# Altium PCB Performance Logger.PcbDoc
Units mil, origin at the board's own origin, x right, y up, seen from the top; angles counter-clockwise.
Board outline 5680 x 4100 mil, 2 copper layers (Top, Bottom); 42 components, 74 nets, 854 pads, 10 vias.
Unrouted connection lines stored in the file: 3.
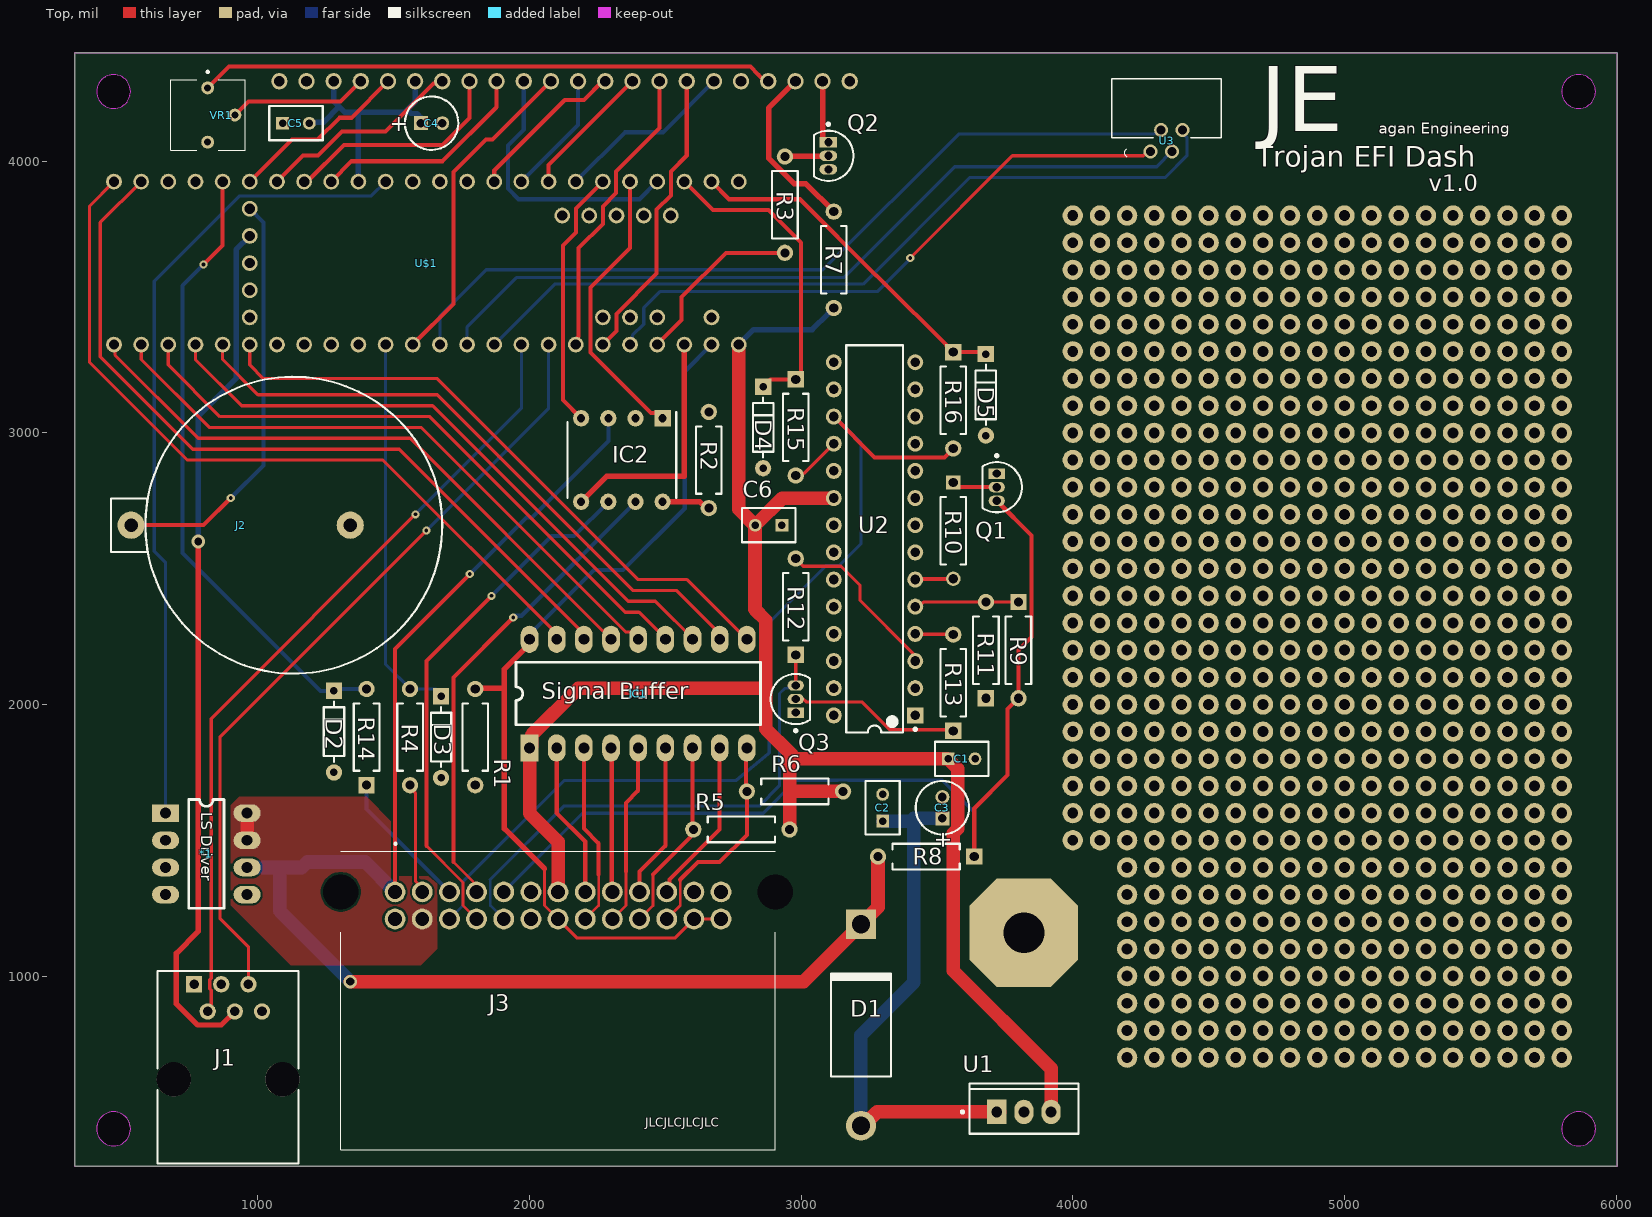
[diagram p0: Top view]
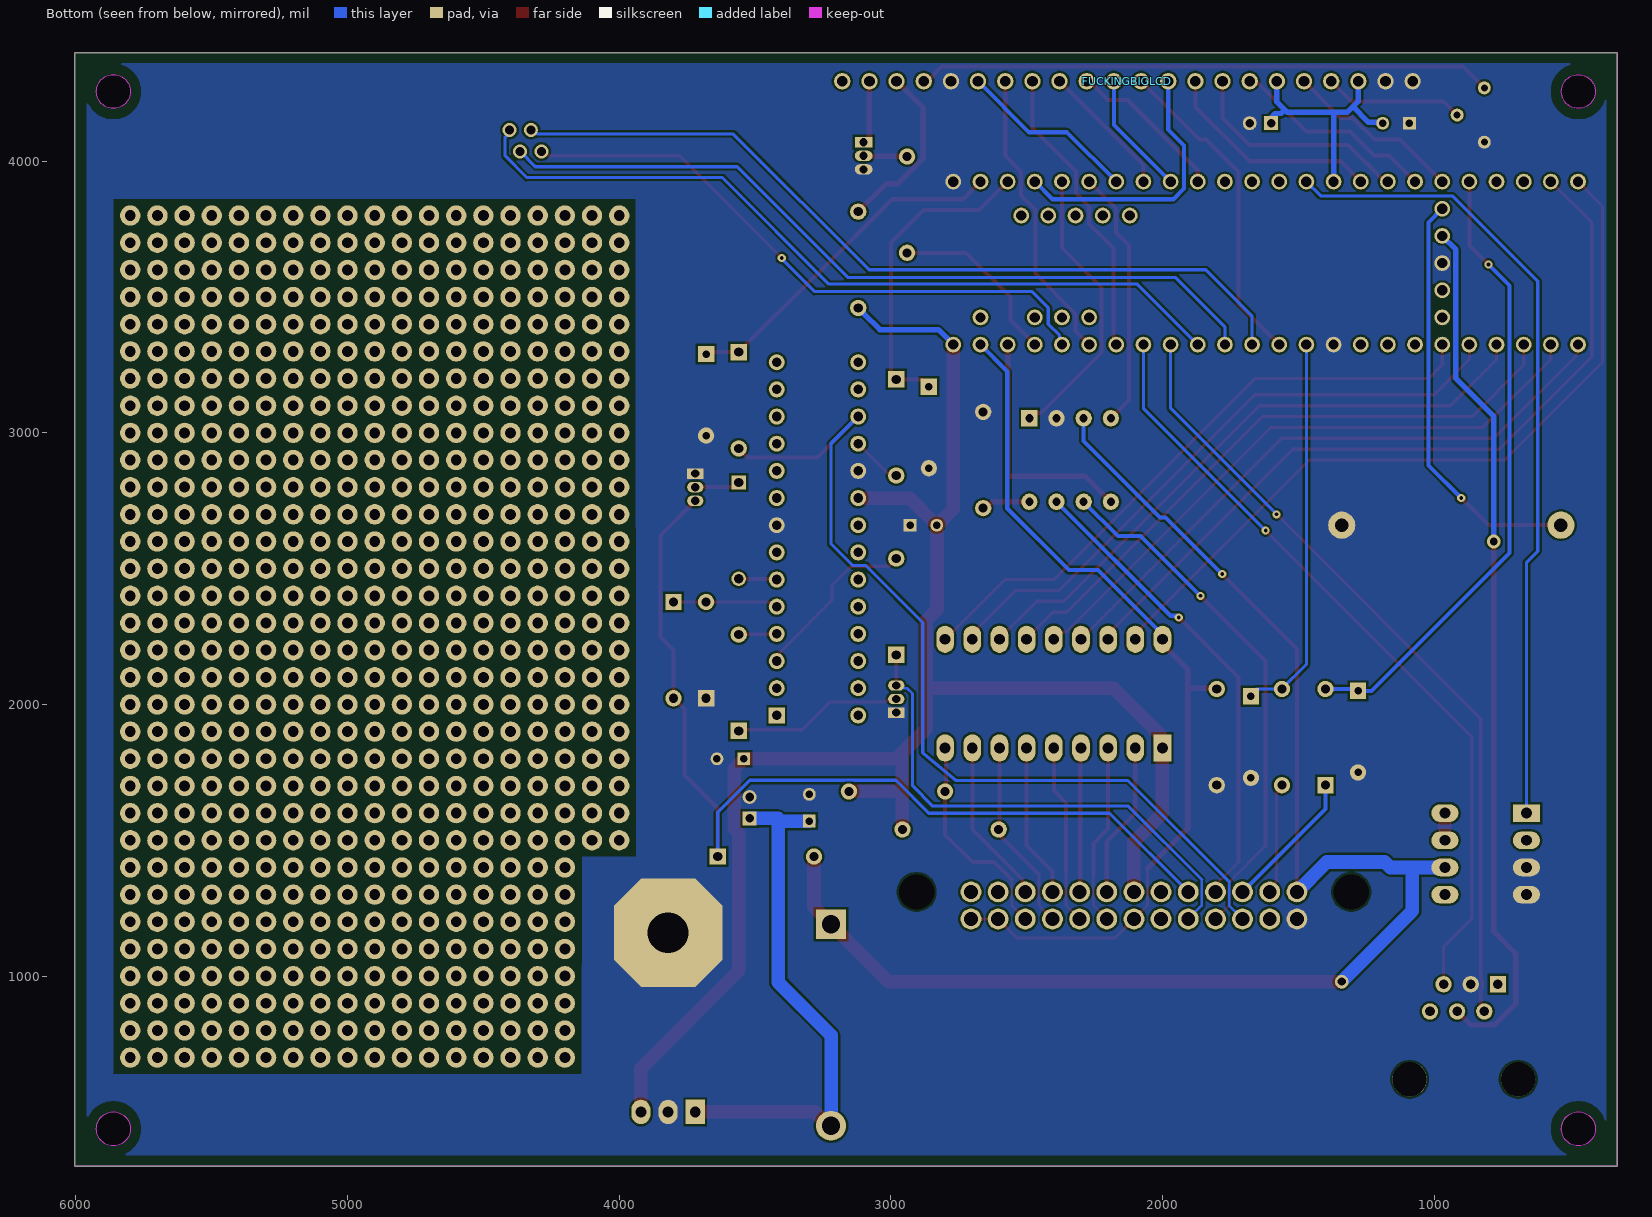
[diagram p1: Bottom view, seen from below]

## Layer stack, top to bottom
Top Solder: solder mask 0.4, Solder Resist, Dk 3.5
Top: signal copper 1.378
Dielectric 1: dielectric 12.6, FR-4, Dk 4.8
Bottom: signal copper 1.378
Bottom Solder: solder mask 0.4, Solder Resist, Dk 3.5

## Board outline
325,4400 325,300 6005,300 6005,4400
cut-out: 468.5,4194.19 ccw(c468.5,4256.69) 531,4256.69 ccw(c468.5,4256.69) 468.5,4319.19 ccw(c468.5,4256.69) 406,4256.69 ccw(c468.5,4256.69)
cut-out: 5862.2,4194.19 ccw(c5862.2,4256.69) 5924.7,4256.69 ccw(c5862.2,4256.69) 5862.2,4319.19 ccw(c5862.2,4256.69) 5799.7,4256.69 ccw(c5862.2,4256.69)
cut-out: 5862.2,375.3 ccw(c5862.2,437.8) 5924.7,437.8 ccw(c5862.2,437.8) 5862.2,500.3 ccw(c5862.2,437.8) 5799.7,437.8 ccw(c5862.2,437.8)
cut-out: 468.5,375.3 ccw(c468.5,437.8) 531,437.8 ccw(c468.5,437.8) 468.5,500.3 ccw(c468.5,437.8) 406,437.8 ccw(c468.5,437.8)

## Design rules (kind name [scope] priority, off if disabled: settings)
BoardOutlineClearance mdCopperDimension [All] p1: gap=10 ignorepadtopadclearanceinfootprint=FALSE except(0: Arc-SplitContinuation Track-SplitContinuation SMDPad-SplitContinuation THPad-SplitContinuation Via-SplitContinuation Fill-SplitContinuation Poly-SplitContinuation Region-SplitContinuation Text-SplitContinuation; 40: Poly-OutlineEdge Poly-CavityEdge Poly-CutoutEdge Poly-SplitBarrior)
Clearance [All] p1: gap=8 ignorepadtopadclearanceinfootprint=FALSE except(6: Arc-THPad Track-THPad)
HoleSize [All] p1: absolutevalues=TRUE maxlimit=100000 minlimit=13.78 maxpercent=80.000 minpercent=20.000
HoleToHoleClearance mdDrill [All] p1: gap=6 allowstackedmicrovias=TRUE
MinimumSolderMaskSliver [All] p1 off: minsoldermaskwidth=10
PasteMaskExpansion mlMinCreamFrame [All] p1: expansion=0
PolygonConnect ThermalVias [IsVia] p1: connectstyle=Direct reliefconductorwidth=10 reliefentries=4 polygonreliefangle="90 Angle" airgapwidth=10
PolygonConnect [All] p2: connectstyle=Direct reliefconductorwidth=10 reliefentries=4 polygonreliefangle="90 Angle" airgapwidth=10
RoutingVias [All] p1: holewidth=13.78 width=29.78 viastyle="Through Hole" minholewidth=13.78 minwidth=29.78 maxholewidth=100 maxwidth=100
SolderMaskExpansion mlMinStopFrame [All] p1: expansion=4 istentingtop=FALSE
Width [All] p1: maxlimit=10000 minlimit=6 preferedwidth=15 minimp=50.000000 maximp=50.000000 favimp=50.000000
26 further rules are at their usual default settings.

## Components (designator, comment, footprint, x,y, rotation, side; value= is the part's Value field where it differs from the comment)
*1 "LS_DriverV1.1" LS_DriverV1.1 660,1600 r0 top
C1 ".1u" FP-K105Z20Y5VF5TL2-MFG 3590.79,1800 r0 top value=1uF
C2 ".1u" FP-K105Z20Y5VF5TL2-MFG 3300,1620 r90 top value=1uF
C3 "10u" CAPPR55-200-1100X500X1200 3520,1620 r90 top
C4 "10u" CAPPR55-200-1100X500X1200 1639.37,4140 r0 top
C5 ".1u" FP-K105Z20Y5VF5TL2-MFG 1140,4140 r0 top value=1uF
C6 ".1u" FP-K105Z20Y5VF5TL2-MFG 2880,2660 r180 top value=1uF
D1 "SBR1045SD1-T" DO-201AD 3220,820 r90 top
D2 "1N4148TA" FP-017AG-MFG 1280,1900 r270 top value=4pF
D3 "1N4148TA" FP-017AG-MFG 1674.29,1880 r270 top value=4pF
D4 "1N4148TA" FP-017AG-MFG 2860,3020 r270 top value=4pF
D5 "1N4148TA" FP-017AG-MFG 3680,3140 r270 top value=4pF
FUCKINGBIGLCD "BIIIGGG_DEVICE" BIIIGGG_FOOTPRINT 6000,300 r180 bottom
IC1 "SignalBufferV1" DIP18 2000,1840 r90 top
IC2 "MCP2562FD-E_P" DIP781W56P254L950H533Q8N 2340,2900 r270 top
J1 "615006141121" 615006141121 889.99,664.08 r0 top
J2 "106" 106_1 459.5,2660 r180 top
J3 "185904-2" 1859042 2105,361.18 r90 top
Q1 "2N3904" ONSC-TO-92-3-29-11#1 3720,2800 r270 top
Q2 "BC337" ONSC-TO-92-3-29-11#2 3100,4020 r270 top
Q3 "2N3904" ONSC-TO-92-3-29-11#1 2980,2020 r90 top
R1 "MFR-25FBF52-1K" RESA60-630X240#1 1800,1880 r270 top value=1k
R2 "MFR-25FBF52-10K" RESA60-630X240#1 2660,2900 r270 top value=10k
R3 "1K" RESA60-630X240#1 2940,3840 r270 top
R4 "MFR-25FBF52-10K" RESA60-630X240#1 1560,1880 r90 top value=10k
R5 "MFR-25FBF52-2K21" RESA60-630X240#1 2780,1540 r0 top value=2.21k
R6 "MFR-25FBF52-2K21" RESA60-630X240#1 2977.17,1680 r0 top value=2.21k
R7 "MFR-25FBF52-221R" RESA60-630X240#1 3120,3637.17 r270 top value=221
R8 "MFR-25FBF52-475R" RESA60-630X240#2 3460,1440 r180 top value=475
R9 "MFR-25FBF52-22K1" RESA60-630X240#2 3800,2200 r270 top value=22.1k
R10 "MFR-25FBF52-2K21" RESA60-630X240#3 3560,2640 r270 top value=2.21k
R11 "MFR-25FBF52-10K" RESA60-630X240#2 3680,2200 r90 top value=10k
R12 "MFR-25FBF52-4K75" RESA60-630X240#2 2980,2360 r90 top value=4.75k
R13 "MFR-25FBF52-2K21" RESA60-630X240#2 3560,2080 r90 top value=2.21k
R14 "MFR-25FBF52-10K" RESA60-630X240#2 1400,1880 r90 top value=10k
R15 "MFR-25FBF52-1K" RESA60-630X240#2 2980,3020 r270 top value=1k
R16 "MFR-25FBF52-1K" RESA60-630X240#2 3560,3120 r270 top value=1k
U1 "LM7805CT" FAIR-TO-220-3 3820,500 r90 top
U2 "PIC18F2620-I/SP" SPDIP300-SP28 3270,2610 r180 top
U3 "SLW4R-1C7LF" FCI_SLW4R-1C7LF 4286,4036 r0 top
U$1 "TEENSY_3.5/3.6" TEENSY_3.5/3.6 1670,3625 r180 top
VR1 "T73YE103KT20" T73YE103KT20 815,4270 r90 top

## Footprints (in the part's own frame and the unit in brackets; to place one, negate y for a bottom-side part, rotate by r counter-clockwise, add the part's x,y. Pads: shape width x height; smd on the part's side, far side on the other; paste and mask are expansions set on the pad)
106_1 [mil]
  round 100 hole 50: 1(-880.5,0) 2(-73.41,0)
  silkscreen extent -1219,-546 0,546
1859042 [mm]
  round 1.95 hole 1.3: 1(24.1,15.24) 2(24.1,12.7) 3(24.1,10.16) 4(24.1,7.62) 5(24.1,5.08) 6(24.1,2.54) 7(24.1,0) 8(24.1,-2.54) 9(24.1,-5.08) 10(24.1,-7.62) 11(24.1,-10.16) 12(24.1,-12.7) 13(24.1,-15.24) 14(21.56,15.24) 15(21.56,12.7) 16(21.56,10.16) 17(21.56,7.62) 18(21.56,5.08) 19(21.56,2.54) 20(21.56,0) 21(21.56,-2.54) 22(21.56,-5.08) 23(21.56,-7.62) 24(21.56,-10.16) 25(21.56,-12.7) 26(21.56,-15.24)
  round 1.65 hole 3.3 unplated: 27(24.1,20.32) 28(24.1,-20.32)
  silkscreen extent 0,-20.32 28.7,20.32, body extent -0.06,-24.19 27.84,24.05, height 16.96
615006141121 [mil] "Modular Jack Horizontal Plastic 6P6C Tab Down"
  rect 60x60 hole 35.43: 1(-124.99,305.92)
  round 60 hole 35.43: 2(-74.99,205.92) 3(-24.99,305.92) 4(25.01,205.92) 5(75.01,305.92) 6(125.01,205.92)
  round 125.98 hole 125.98 unplated: MH1(-199.99,-44.08) MH2(200.01,-44.08)
  silkscreen extent -260,-354 260,354, body extent -260,-354 260,354, height 462
BIIIGGG_FOOTPRINT [mm] "BIIIGGG_FOOTPRINT"
  oval 1.508x1.524 hole 1: P1(125,101.46)
  round 1.524 hole 1: P2(122.46,101.46) P3(119.92,101.46) P4(117.38,101.46) P5(114.84,101.46) P6(112.3,101.46) P7(109.76,101.46) P8(107.22,101.46) P9(104.68,101.46) P10(102.14,101.46) P11(99.6,101.46) P12(97.06,101.46) P13(94.52,101.46) P14(91.98,101.46) P15(89.44,101.46) P16(86.9,101.46) P17(84.36,101.46) P18(81.82,101.46) P19(79.28,101.46) P20(76.74,101.46) P21(74.2,101.46) P22(71.66,101.46)
  body extent 70.9,100.7 125.76,103.73, height 1.27
CAPPR55-200-1100X500X1200 [mm] "THD, 2-Leads, Dia 5mm, Body Length 11mm"
  rect 1.3x1.3 hole 0.8: 1(-1,0)
  round 1.3 hole 0.8: 2(1,0)
  silkscreen extent -2.5,-2.5 2.5,2.5, body extent -2.5,-2.5 2.5,2.5, height 12
DIP18 [mil]
  rect 100x65 hole 40: 1(0,0)
  oval 100x65 hole 40: 2(0,-100) 3(0,-200) 4(0,-300) 5(0,-400) 6(0,-500) 7(0,-600) 8(0,-700) 9(0,-800) 10(400,-800) 11(400,-700) 12(400,-600) 13(400,-500) 14(400,-400) 15(400,-300) 16(400,-200) 17(400,-100) 18(400,0)
  silkscreen extent 85,-850 315,50, body extent -60,-845 460,45, height 158
DIP781W56P254L950H533Q8N [mil]
  rect 60x60 hole 29.88: 1(-153.74,150)
  round 60 hole 29.88: 2(-153.74,50) 3(-153.74,-50) 4(-153.74,-150) 5(153.74,-150) 6(153.74,-50) 7(153.74,50) 8(153.74,150)
  silkscreen extent -177,-200 140,200, body extent -159,-187 159,187, height 210
DO-201AD [mm] "Diode, Axial; Body 9.5 x 5.6 mm (LxDia. max), Lead Dia. 1.32 mm (max)"
  round 2.8 hole 1.7: 1(-9.42,0)
  rect 2.8x2.8 hole 1.7: 2(9.42,0)
  silkscreen extent -4.8,-2.8 4.9,2.8
FAIR-TO-220-3 [mil] "FM, 3-Leads, Body 10.2x4.7mm, Pitch 2.54mm"
  rect 90x70 hole 39.37: 1(0,100)
  oval 90x70 hole 39.37: 2(0,0) 3(0,-100)
  silkscreen extent -80,-201 105,231, body extent -80,-201 105,201, height 746
FCI_SLW4R-1C7LF [mil]
  round 52 hole 32: 1(0,0) 2(39,79) 3(79,0) 4(118,79)
  silkscreen extent -142,-19 260,268
FP-017AG-MFG [mil]
  rect 60x60 hole 27.56 paste-39370.1 mask+0: 1(-150.12,0)
  round 60 hole 27.56 paste-39370.1 mask+0: 2(150.12,0)
  silkscreen extent -111,-38 111,38, body extent -178,-42 178,42, height 10
FP-K105Z20Y5VF5TL2-MFG [mm]
  rect 1.2x1.2 hole 0.7 paste-1000 mask+0: 1(-1.25,0)
  round 1.2 hole 0.7 paste-1000 mask+0: 2(1.25,0)
  silkscreen extent -2.5,-1.6 2.5,1.6, body extent -2.6,-1.7 2.6,1.7, height 0.25
LS_DriverV1.1 [mil]
  rect 100x65 hole 40: 1(0,0)
  oval 100x65 hole 40: 2(0,-100) 3(0,-200) 4(0,-300) 5(300,-300) 6(300,-200) 7(300,-100) 8(300,0)
  silkscreen extent 85,-350 215,50, body extent -55,-345 355,45, height 170
ONSC-TO-92-3-29-11#1 [mil] "TO, 3-Leads, Body Dia 4.7mm, Pitch 1.27mm"
  rect 38x60 hole 30: 1(-50,0)
  oval 38x60 hole 30: 2(0,0) 3(50,0)
  silkscreen extent -121,-53 92,92, body extent -92,-53 93,93, height 310
ONSC-TO-92-3-29-11#2 [mil] "TO, 3-Leads, Body Dia 4.7mm, Pitch 1.27mm"
  rect 38x65 hole 30: 1(-50,0)
  oval 38x65 hole 30: 2(0,0) 3(50,0)
  silkscreen extent -121,-53 92,92, body extent -92,-53 93,93, height 310
RESA60-630X240#1 [mil] "Axial Resistor, 2-Leads, Dia 2.4mm, Body Length 6.3mm"
  round 60 hole 33.46: 1(-177.17,0) 2(177.17,0)
  silkscreen extent -124,-47 124,47, body extent -188,-47 188,47, height 94
RESA60-630X240#2 [mil] "Axial Resistor, 2-Leads, Dia 2.4mm, Body Length 6.3mm"
  rect 60x60 hole 33.46: 1(-177.17,0)
  round 60 hole 33.46: 2(177.17,0)
  silkscreen extent -124,-47 124,47, body extent -188,-47 188,47, height 94
RESA60-630X240#3 [mil] "Axial Resistor, 2-Leads, Dia 2.4mm, Body Length 6.3mm"
  rect 53.15x53.15 hole 33.46: 1(-177.17,0)
  round 53.15 hole 33.46: 2(177.17,0)
  silkscreen extent -124,-47 124,47, body extent -188,-47 188,47, height 94
SPDIP300-SP28 [mm] "DIP, 28-Pin, Row Spacing 7.62 mm, Pitch 2.54 mm"
  rect 1.5x1.5 hole 0.9: 1(-3.81,16.51)
  round 1.5 hole 0.9: 2(-3.81,13.97) 3(-3.81,11.43) 4(-3.81,8.89) 5(-3.81,6.35) 6(-3.81,3.81) 7(-3.81,1.27) 8(-3.81,-1.27) 9(-3.81,-3.81) 10(-3.81,-6.35) 11(-3.81,-8.89) 12(-3.81,-11.43) 13(-3.81,-13.97) 14(-3.81,-16.51) 15(3.81,-16.51) 16(3.81,-13.97) 17(3.81,-11.43) 18(3.81,-8.89) 19(3.81,-6.35) 20(3.81,-3.81) 21(3.81,-1.27) 22(3.81,1.27) 23(3.81,3.81) 24(3.81,6.35) 25(3.81,8.89) 26(3.81,11.43) 27(3.81,13.97) 28(3.81,16.51)
  silkscreen extent -3.94,-18.1 2.65,18.1, body extent -3.55,-18.1 3.55,18.1, height 5.33
T73YE103KT20 [mm]
  round 1.21 hole 0.66: 1(0,0) 2(-2.54,-2.54) 3(-5.08,0)
  silkscreen extent -5.84,-3.53 1.6,3.47, body extent -5.84,-3.53 0.76,3.47, height 4.8
TEENSY_3.5/3.6 [mil] "TEENSY_3.5/3.6"
  round 58 hole 38: 0/RX(-1000,-300) 1/TX(-900,-300) 2(-800,-300) 3/CANTX(-700,-300) 3V3(300,-300) 3V3_2(700,-100) 3V3_LO(-900,300) 4/CANRX(-600,-300) 5(-500,-300) 6(-400,-300) 7(-300,-300) 8(-200,-300) 9/CS(-100,-300) 10/CS(0,-300) 11/MOSI(100,-300) 12/MISO(200,-300) 13/SCK(200,300) 14/A0(100,300) 15/A1(0,300) 16/A2(-100,300) 17/A3(-200,300) 18/A4/SDA(-300,300) 19/A5/SCL(-400,300) 20/A6(-500,300) 21/A7(-600,300) 21/DAC0(500,300) 22/A8(-700,300) 23/A9(-800,300) 24(400,-300) 25(500,-300) 26(600,-300) 27(700,-300) 28(800,-300) 29(900,-300) 30(1000,-300) 31/A12(1100,-300) 32/A13(1200,-300) 33/A14(1200,300) 34/A15(1100,300) 35/A16(1000,300) 36/A17(900,300) 37/A18(800,300) 38/A19(700,300) 39/A20(600,300) A10(-700,200) A11(-600,200) A22/DAC1(400,300) AGND(-1000,300) AREF(-800,200) GND(-1100,-300) GND2(300,300) GND3(700,0) PROG(700,100) RESET(700,200) U5V(-850,-175) UD+(-650,-175) UD-(-750,-175) UGND1(-550,-175) UGND2(-450,-175) VBAT(700,-200) VIN(-1100,300) VUSB(-1000,200)
  body extent -1129,-329 1229,329, height 50

## Part data
*1: library part CMP-001-0000-1, "10A capable Low side Switch in an 8dip"
C1 C2 C5 C6: library part CMP-02417-000003-1, "CAP CER 1UF 50V Y5V RADIAL", Capacitance=1uF, Manufacturer="Vishay BC Components", Manufacturer Part Number=K105Z20Y5VF5TL2, Temperature="-30°C to +85°C", Temperature Characteristic=Y5V, Temperature Range High=+85°C, Temperature Range Low=-30°C, Tolerance=-20+80%, Voltage Rating=50V, Automotive=No, Category=Cap, ComponentLink2Description=Datasheet, ComponentLink2URL=https://www.vishay.com/docs/45171/kseries.pdf, Device Class L1="Passive Components", Device Class L2=Capacitors, Device Class L3="Ceramic Capacitors", Digikey Description="CAP CER 1UF 50V Y5V RADIAL", Height=6.6mm, Lead Free=Yes, Material=Ceramic, Mouser Description="Multilayer Ceramic Capacitors MLCC - Leaded 1uF 50volts +80/-20% Y5V 2.5mm LS", Octopart=https://octopart.com/k105z20y5vf5tl2-vishay-39475252, Package=K105Z20Y5VF5TL2, RoHS=TRUE
C3 C4: library part CMP-1665-00038-2, "Aluminum Electrolytic Capacitor, 10 uF, +/- 20%, 50 V, -40 to 85 degC, 2-Pin THD, RoHS, Bulk", Capacitance=10uF, Case/Package=Radial, Dielectric Material=Aluminium, Leakage Current=3uA, Manufacturer=Panasonic, Max Operating Temperature=85degC, Min Operating Temperature=-40degC, Package Description="2-Pin Radial Lead, Dia 5 mm, Height 12 mm", Package Quantity=200, Package Reference=CAPPR55-200-1100X500X1200, Ripple Current=65mA, Tolerance=20%, Voltage=50V, Datasheet URL=https://industrial.panasonic.com/cdbs/www-data/pdf/RDF0000/ABA0000C1218.pdf, Datasheet Version="Rev. 05, 10/2016", Diameter=5mm, Dissipation Factor=0.12%, Height=11mm, Height - Seated (Max)=0.472inch, Lead Diameter=0.5mm, Lead Free=LeadFree, Lead Pitch=2mm, Lead/Base Style=Straight, Length=11mm, Life (Hours)=2000Hour, Manufacturer URL=http://www.panasonic.com/, Mount=ThroughHole, Number of Pins=2, Packaging=Bulk, Radiation Hardening=No, REACH SVHC=NoSVHC, Ripple Current (AC)=65mA, RoHSCompliant=true, Termination=Radial, Voltage Rating=50V, Voltage Rating (DC)=50V
D1: "Diode", Manufacturer_Name="Diodes Inc.", Mouser Part Number=621-SBR1045SD1-T, Arrow Part Number=SBR1045SD1-T, Arrow Price/Stock=https://www.arrow.com/en/products/sbr1045sd1-t/diodes-incorporated, Datasheet Link=https://static6.arrow.com/aropdfconversion/e9ac78d29ec4e1440bcb8a4d828fb4ad9c4e4821/sbr1045sd1.pdf, Manufacturer_Part_Number=SBR1045SD1-T, Mouser Price/Stock=https://www.mouser.co.uk/ProductDetail/Diodes-Incorporated/SBR1045SD1-T?qs=aXnpsjvrXd14ZHU8QjK7zA%3D%3D
D2 D3 D4 D5: library part CMP-07163-000009-1, "DIODE GEN PURP 100V 200MA DO35", Capacitance=4pF, Forward Current=200mA, Manufacturer="ON Semiconductor", Max Junction Temp=+175°C, Max Repetitive Reverse Voltage=100V, Max Surge Forward Current=1A, Package=017AG, Peak Reverse Current=5uA, Temperature="-55°C to +175°C", Temperature Range Low=-55°C, Automotive=No, Category=Diode, ComponentLink2Description=Datasheet, ComponentLink2URL=https://www.onsemi.com/pub/Collateral/1N914A-D.pdf, Device Class L1="Discrete Semiconductors", Device Class L2=Diodes, Device Class L3="Rectifier Diodes", Digikey Description="DIODE GEN PURP 100V 200MA DO35", Footprint Url=https://www.onsemi.com/pub/Collateral/017AG.PDF, Height=1.91mm, Lead Free=Yes, Manufacturer Part Number=1N4148TA, Octopart=https://octopart.com/1n4148ta-on+semiconductor-84323124, Reverse Voltage=100V, RoHS=TRUE, Temperature Range High=+175°C
IC1: library part SignalBufferV1-7, "Signal Buffer Board"
IC2: "Integrated Circuit", Arrow Part Number=MCP2562FD-E/P, Manufacturer_Name=Microchip, Mouser Part Number=579-MCP2562FD-E/P, Arrow Price/Stock=https://www.arrow.com/en/products/mcp2562fd-ep/microchip-technology, Datasheet Link=https://componentsearchengine.com/Datasheets/2/MCP2562FD-E_P.pdf, Height=5.334mm, Manufacturer_Part_Number=MCP2562FD-E/P, Mouser Price/Stock=https://www.mouser.co.uk/ProductDetail/Microchip-Technology/MCP2562FD-E-P?qs=YlpJWyuQ3PMgzspdOlrnPg%3D%3D
J1: library part CMP-1502-01674-1, "Modular Jack WR-MJ, Tab Down, Plastic, Horizontal Entry, THT, 6P6C", Contact Resistance=20mOhm, Manufacturer="Wurth Elektronik", Operating Temperature=-40to85degC, Rated Current=1.5A, Withstanding Voltage=1000VAC, Working Voltage=120VAC, Compliance=Leadfree/RoHS, Datasheet URL=https://katalog.we-online.com/em/datasheet/615006141121.pdf, Entrance=Horizontal, Manufacturer URL=http://www.we-online.de, Mounting Technology=THT, Package Reference=615006141121, Packaging=Tray, Part Number=615006141121, Pin Number=6P6C, Port=1x1, Publisher=WurthElektronik
J2: "Connector", Manufacturer_Name="Keystone Electronics", Mouser Part Number=534-106, Arrow Part Number=106, Arrow Price/Stock=https://www.arrow.com/en/products/106/keystone-electronics, Datasheet Link=http://docs-emea.rs-online.com/webdocs/002b/0900766b8002b5fd.pdf, Manufacturer_Part_Number=106, Mouser Price/Stock=https://www.mouser.co.uk/ProductDetail/Keystone-Electronics/106?qs=Q3RoVmURDolnMuconA2vXg%3D%3D
J3: "Connector", Manufacturer_Name="TE Connectivity", Mouser Part Number=571-185904-2, Arrow Part Number=185904-2, Arrow Price/Stock=https://www.arrow.com/en/products/185904-2/te-connectivity, Datasheet Link=http://www.te.com/commerce/DocumentDelivery/DDEController?Action=srchrtrv&DocNm=185904&DocType=Customer+Drawing&DocLang=English&DocFormat=pdf&PartCntxt=1-185904-2, Height=17mm, Manufacturer_Part_Number=185904-2, Mouser Price/Stock=https://www.mouser.co.uk/ProductDetail/TE-Connectivity-AMP/185904-2?qs=UMrTGIqlm7mWBHkoAKrGLw%3D%3D
Q1 Q3: library part CMP-2000-05562-1, "General Purpose Transistor, NPN Silicon, 200 mA, 60 V, -55 to 150 degC, 3-Pin TO-92, RoHS, Bulk", Collector- Base Voltage VCBO=60V, Collector- Emitter Voltage VCEO Max=40V, Collector-Emitter Saturation Voltage=0.3V, Emitter- Base Voltage VEBO=6V, Manufacturer=ONSemiconductor, Maximum DC Collector Current=0.2A, Maximum Operating Temperature=+150C, Maximum Power Dissipation=625mW, Minimum Operating Temperature=-65C, Package / Case=TO-92-3(TO-226), Package Description="3-Pin Transistor Outline, Body 4.825 x 3.685 mm, Pitch 1.27 mm", Package Reference=TO-92-3-29-11, Brand=ONSemiconductor, Configuration=Single, Datasheet URL=https://datasheet.ciiva.com/4725/2n3903-d-285841-4725808.pdf, Datasheet Version="Rev. 8, 08/2012", DC Collector/Base Gain hfe Min=60, Factory Pack Quantity=5000, Gain Bandwidth Product fT=270MHz, Manufacturer URL=http://www.onsemi.com/, Mounting Style=ThroughHole, Mounting Technology=ThroughHole, Packaging=Bulk, Product Category=BipolarTransistors-BJT, RoHS=Details, Transistor Polarity=NPN
Q2: library part CMP-1048-01458-1, "Amplifier Transistor, NPN Silicon, 3-Pin TO-92, Bulk Box", Manufacturer="On Semiconductor", ComponentLink1Description="Manufacturer URL", ComponentLink1URL=http://www.onsemi.com/, ComponentLink2Description=Datasheet, ComponentLink2URL=http://www.onsemi.com/pub_link/Collateral/BC337-D.PDF, ComponentLink3Description="Package Specification", ComponentLink3URL=http://www.onsemi.cn/pub_link/Collateral/2N6426-D.PDF, DatasheetVersion="Rev. 8", IC Continuous (A)=0.8, Mounting Technology="Through Hole", Note1=0, PackageDescription="3-Pin Transistor Outline, Body 4.825 x 3.685 mm, Pitch 1.27 mm", PackageReference=TO-92-3-29-11_AM_SL, PackageVersion="Rev. AM", Packing="Bulk Box", PartNumber=BC337, Polarity=NPN, RoHS=FALSE
R1 R15 R16: library part CMP-009-00048-4, "Axial Resistor, 1 KOhm, +/- 1%, 250 mW, -55 to 155 degC, 2-Pin THD, RoHS, Bulk", Case/Package=Axial, Manufacturer=Yageo, Max Operating Temperature=155°C, Min Operating Temperature=-55°C, Package Description="2-Pin Axial Lead, Dia 2.4 mm, Body Length 6.3 mm", Package Quantity=200, Package Reference=MFR-25, Power=250mW, Tolerance=1%, Voltage Rating=250V, Composition=CarbonFilm, Datasheet URL=http://www.yageo.com/documents/recent/Yageo%20LR_MFR_2013.pdf, Datasheet Version=Apr-13, Manufacturer URL=http://www.yageo.com/, Mounting Technology=TH, Packaging=Bulk, RoHS Compliant=True
R2 R4 R11 R14: library part CMP-009-00047-4, "Axial Resistor, 10 KOhm, +/- 1%, 0.25 W, -55 to 155 degC, 2-Pin THD, RoHS, Bulk", Case/Package=Axial, Manufacturer=Yageo, Max Operating Temperature=155°C, Min Operating Temperature=-55°C, Package Description="2-Pin Axial Lead, Dia 2.4 mm, Body Length 6.3 mm", Package Quantity=200, Package Reference=MFR-25, Power=250mW, Tolerance=1%, Voltage Rating=250V, Datasheet URL=http://www.yageo.com/documents/recent/Yageo%20LR_MFR_2013.pdf, Datasheet Version=Apr-13, Manufacturer URL=http://www.yageo.com/, Mounting Technology=TH, Packaging=Bulk, RoHS Compliant=True
R3: library part CMP-1659-00075-1, "Axial Resistor, 1 KOhm, +/- 1%, 250 mW, -55 to 155 degC, 2-Pin THD, RoHS, Bulk", Case\Package=Axial, Max Operating Temperature="155 degC", Min Operating Temperature="-55 degC", Package Quantity=200, Power Rating="250 mW", Resistance="10 kohm", Tolerance=1%, Voltage Rating="250 V", ComponentLink1Description="Manufacturer URL", ComponentLink1URL=http://www.yageo.com/, ComponentLink2Description=Datasheet, ComponentLink2URL=http://www.yageo.com/documents/recent/Yageo%20LR_MFR_2013.pdf, DatasheetVersion=Apr-13, Length="0.248 inch", PackageDescription="2-Pin Axial Lead, Dia 2.4 mm, Body Length 6.3 mm", PackageReference=MFR-25, Packaging=Bulk, RoHSCompliant=true
R5 R6 R10 R13: library part CMP-009-00054-4, "Axial Resistor, 2.21 KOhm, +/- 1%, 0.25 W, -55 to 155 degC, 2-Pin THD, RoHS, Bulk", Case/Package=Axial, Manufacturer=Yageo, Max Operating Temperature=155°C, Min Operating Temperature=-55°C, Package Description="2-Pin Axial Lead, Dia 2.4 mm, Body Length 6.3 mm", Package Quantity=200, Package Reference=MFR-25, Power=250mW, Tolerance=1%, Voltage Rating=250V, Datasheet URL=http://www.yageo.com/documents/recent/Yageo%20LR_MFR_2013.pdf, Datasheet Version=Apr-13, Manufacturer URL=http://www.yageo.com/, Mounting Technology=TH, Packaging=Bulk, RoHS Compliant=True
R7: library part CMP-009-00051-4, "Axial Resistor, 221 Ohm, +/- 1%, 250 mW, -55 to 155 degC, 2-Pin THD, RoHS, Bulk", Case/Package=Axial, Manufacturer=Yageo, Max Operating Temperature=155°C, Min Operating Temperature=-55°C, Package Description="2-Pin Axial Lead, Dia 2.4 mm, Body Length 6.3 mm", Package Quantity=200, Package Reference=MFR-25, Power=250mW, Tolerance=1%, Voltage Rating=250V, Datasheet URL=http://www.yageo.com/documents/recent/Yageo%20LR_MFR_2013.pdf, Datasheet Version=Apr-13, Manufacturer URL=http://www.yageo.com/, Mounting Technology=TH, Packaging=Bulk, RoHS Compliant=True
R8: library part CMP-009-00056-4, "Axial Resistor, 475 Ohm, +/- 1%, 0.25 W, -55 to 155 degC, 2-Pin THD, RoHS, Bulk", Case/Package=Axial, Manufacturer=Yageo, Max Operating Temperature=155°C, Min Operating Temperature=-55°C, Package Description="2-Pin Axial Lead, Dia 2.4 mm, Body Length 6.3 mm", Package Quantity=200, Package Reference=MFR-25, Power=250mW, Tolerance=1%, Voltage Rating=250V, Datasheet URL=http://www.yageo.com/documents/recent/Yageo%20LR_MFR_2013.pdf, Datasheet Version=Apr-13, Manufacturer URL=http://www.yageo.com/, Mounting Technology=TH, Packaging=Bulk, RoHS Compliant=True
R9: library part CMP-009-00052-4, "Axial Resistor, 22.1 KOhm, +/- 1%, 0.25 W, -55 to 155 degC, 2-Pin THD, RoHS, Bulk", Case/Package=Axial, Manufacturer=Yageo, Max Operating Temperature=155°C, Min Operating Temperature=-55°C, Package Description="2-Pin Axial Lead, Dia 2.4 mm, Body Length 6.3 mm", Package Quantity=200, Package Reference=MFR-25, Power=250mW, Tolerance=1%, Voltage Rating=250V, Datasheet URL=http://www.yageo.com/documents/recent/Yageo%20LR_MFR_2013.pdf, Datasheet Version=Apr-13, Manufacturer URL=http://www.yageo.com/, Mounting Technology=TH, Packaging=Bulk, RoHS Compliant=True
R12: library part CMP-009-00059-4, "Axial Resistor, 4.75 KOhm, +/- 1%, 0.25 W, -55 to 155 degC, 2-Pin THD, RoHS, Bulk", Case/Package=Axial, Manufacturer=Yageo, Max Operating Temperature=155°C, Min Operating Temperature=-55°C, Package Description="2-Pin Axial Lead, Dia 2.4 mm, Body Length 6.3 mm", Package Quantity=200, Package Reference=MFR-25, Power=250mW, Tolerance=1%, Voltage Rating=250V, Composition=MetalFilm, Datasheet URL=http://www.yageo.com/documents/recent/Yageo%20LR_MFR_2013.pdf, Datasheet Version=Apr-13, Manufacturer URL=http://www.yageo.com/, Mounting Technology=TH, Packaging=Bulk, RoHS Compliant=True
U1: library part CMP-2000-04938-1, "Positive Voltage Regulator, 5 V, 1 A, -40 to 125 degC, 3-Pin TO-220, RoHS, Tube", Manufacturer=FairchildSemiconductor, Maximum Input Voltage=35V, Maximum Output Current=2.2(Typ)A, Maximum Quiescent Current=8mA, Operating Temperature=-40to125degC, Output Voltage=5V, Package=3TO-220AB, Package Description="3-Pin Through Hole Device, Body 10 x 4.5 mm, Pitch 2.54 mm", Package Reference=TO-220, Typical Dropout Voltage @ Current=2@1AV, Accuracy=±4%, Category=LinearRegulator, Datasheet URL=https://datasheet.ciiva.com/26904/lm7805ct-26904988.pdf, Datasheet Version=Aug-12, Line Regulation=100mV, Load Regulation=100mV, Manufacturer URL=https://www.fairchildsemi.com/, Mounting=ThroughHole, Number of Outputs=1, Output Type=Fixed, Package URL=https://www.fairchildsemi.com/package-drawings/TO/TO220B03.pdf, Packaging=Rail/Tube, Polarity=Positive, Rad Hard=No, Type=Linear
U2: library part CMP-0116-00068-1, "Enhanced Flash Microcontroller with 10-Bit A/D and nanoWatt Technology, 64K Flash, 28-Pin PDIP, Industrial Temperature Range", DatasheetVersion="revE, May-2008", PackageDescription="28-Lead Skinny Plastic Dual In-Line (SP) - 300 mil Body [SPDIP]", PackageReference=SPDIP300-SP28, PackageVersion="revBB, Aug-2009"
U3: "4 Position FFC, FPC Connector Contacts, Bottom 0.039 (1.00mm) Through Hole, Right Angle", Package=None, Digi-Key_Part_Number=609-1928-ND, DigiKey-Purchase-URL=https://snapeda.com/shop?store=DigiKey&id=31876, MF="Amphenol ICC", MP=SLW4R-1C7LF, SnapEDA_Link=https://www.snapeda.com/parts/SLW4R-1C7LF/Amphenol%20FCI/view-part/31876/?ref=snap
VR1: "Variable Resistor", Manufacturer_Name=Vishay, Mouser Part Number=72-T70YE-10K, Arrow Part Number=T73YE103KT20, Arrow Price/Stock=https://www.arrow.com/en/products/t73ye103kt20/vishay, Datasheet Link=https://www.mouser.com/datasheet/2/427/t73-239983.pdf, Height=4.7mm, Manufacturer_Part_Number=T73YE103KT20, Mouser Price/Stock=https://www.mouser.co.uk/ProductDetail/Vishay-Sfernice/T73YE103KT20?qs=LCMWAU1DZczcFWP7UOhLsQ%3D%3D
FUCKINGBIGLCD: DeviceSetName=BIIIGGG_DEVICE, GateName_1=G$1, LibraryName="Biiiggg LCD", SymbolName_1=BIIIGGG_SYMBOL
U$1: DeviceSetName=TEENSY_3.5/3.6, GateName_1=G$1, LibraryName=Teensy356, SymbolName_1=TEENSY_3.5/3.6

## Free pads (board coordinates)
  round 75 hole 40: 0(4000,1500) 0(4000,1600) 0(4000,1700) 0(4000,1800) 0(4000,1900) 0(4000,2000) 0(4000,2100) 0(4000,2200) 0(4000,2300) 0(4000,2400) 0(4000,2500) 0(4000,2600) 0(4000,2700) 0(4000,2800) 0(4000,2900) 0(4000,3000) 0(4000,3100) 0(4000,3200) 0(4000,3300) 0(4000,3400) 0(4000,3500) 0(4000,3600) 0(4000,3700) 0(4000,3800) 0(4100,1500) 0(4100,1600) 0(4100,1700) 0(4100,1800) 0(4100,1900) 0(4100,2000) 0(4100,2100) 0(4100,2200) 0(4100,2300) 0(4100,2400) 0(4100,2500) 0(4100,2600) 0(4100,2700) 0(4100,2800) 0(4100,2900) 0(4100,3000) 0(4100,3100) 0(4100,3200) 0(4100,3300) 0(4100,3400) 0(4100,3500) 0(4100,3600) 0(4100,3700) 0(4100,3800) 0(4200,700) 0(4200,800) 0(4200,900) 0(4200,1000) 0(4200,1100) 0(4200,1200) 0(4200,1300) 0(4200,1400) 0(4200,1500) 0(4200,1600) 0(4200,1700) 0(4200,1800) 0(4200,1900) 0(4200,2000) 0(4200,2100) 0(4200,2200) 0(4200,2300) 0(4200,2400) 0(4200,2500) 0(4200,2600) 0(4200,2700) 0(4200,2800) 0(4200,2900) 0(4200,3000) 0(4200,3100) 0(4200,3200) 0(4200,3300) 0(4200,3400) 0(4200,3500) 0(4200,3600) 0(4200,3700) 0(4200,3800) 0(4300,700) 0(4300,800) 0(4300,900) 0(4300,1000) 0(4300,1100) 0(4300,1200) 0(4300,1300) 0(4300,1400) 0(4300,1500) 0(4300,1600) 0(4300,1700) 0(4300,1800) 0(4300,1900) 0(4300,2000) 0(4300,2100) 0(4300,2200) 0(4300,2300) 0(4300,2400) 0(4300,2500) 0(4300,2600) 0(4300,2700) 0(4300,2800) 0(4300,2900) 0(4300,3000) 0(4300,3100) 0(4300,3200) 0(4300,3300) 0(4300,3400) 0(4300,3500) 0(4300,3600) 0(4300,3700) 0(4300,3800) 0(4400,700) 0(4400,800) 0(4400,900) 0(4400,1000) 0(4400,1100) 0(4400,1200) 0(4400,1300) 0(4400,1400) 0(4400,1500) 0(4400,1600) 0(4400,1700) 0(4400,1800) 0(4400,1900) 0(4400,2000) 0(4400,2100) 0(4400,2200) 0(4400,2300) 0(4400,2400) 0(4400,2500) 0(4400,2600) 0(4400,2700) 0(4400,2800) 0(4400,2900) 0(4400,3000) 0(4400,3100) 0(4400,3200) 0(4400,3300) 0(4400,3400) 0(4400,3500) 0(4400,3600) 0(4400,3700) 0(4400,3800) 0(4500,700) 0(4500,800) 0(4500,900) 0(4500,1000) 0(4500,1100) 0(4500,1200) 0(4500,1300) 0(4500,1400) 0(4500,1500) 0(4500,1600) 0(4500,1700) 0(4500,1800) 0(4500,1900) 0(4500,2000) 0(4500,2100) 0(4500,2200) 0(4500,2300) 0(4500,2400) 0(4500,2500) 0(4500,2600) 0(4500,2700) 0(4500,2800) 0(4500,2900) 0(4500,3000) 0(4500,3100) 0(4500,3200) 0(4500,3300) 0(4500,3400) 0(4500,3500) 0(4500,3600) 0(4500,3700) 0(4500,3800) 0(4600,700) 0(4600,800) 0(4600,900) 0(4600,1000) 0(4600,1100) 0(4600,1200) 0(4600,1300) 0(4600,1400) 0(4600,1500) 0(4600,1600) 0(4600,1700) 0(4600,1800) 0(4600,1900) 0(4600,2000) 0(4600,2100) 0(4600,2200) 0(4600,2300) 0(4600,2400) 0(4600,2500) 0(4600,2600) 0(4600,2700) 0(4600,2800) 0(4600,2900) 0(4600,3000) 0(4600,3100) 0(4600,3200) 0(4600,3300) 0(4600,3400) 0(4600,3500) 0(4600,3600) 0(4600,3700) 0(4600,3800) 0(4700,700) 0(4700,800) 0(4700,900) 0(4700,1000) 0(4700,1100) 0(4700,1200) 0(4700,1300) 0(4700,1400) 0(4700,1500) 0(4700,1600) 0(4700,1700) 0(4700,1800) 0(4700,1900) 0(4700,2000) 0(4700,2100) 0(4700,2200) 0(4700,2300) 0(4700,2400) 0(4700,2500) 0(4700,2600) 0(4700,2700) 0(4700,2800) 0(4700,2900) 0(4700,3000) 0(4700,3100) 0(4700,3200) 0(4700,3300) 0(4700,3400) 0(4700,3500) 0(4700,3600) 0(4700,3700) 0(4700,3800) 0(4800,700) 0(4800,800) 0(4800,900) 0(4800,1000) 0(4800,1100) 0(4800,1200) 0(4800,1300) 0(4800,1400) 0(4800,1500) 0(4800,1600) 0(4800,1700) 0(4800,1800) 0(4800,1900) 0(4800,2000) 0(4800,2100) 0(4800,2200) 0(4800,2300) 0(4800,2400) 0(4800,2500) 0(4800,2600) 0(4800,2700) 0(4800,2800) 0(4800,2900) 0(4800,3000) 0(4800,3100) 0(4800,3200) 0(4800,3300) 0(4800,3400) 0(4800,3500) 0(4800,3600) 0(4800,3700) 0(4800,3800) 0(4900,700) 0(4900,800) 0(4900,900) 0(4900,1000) 0(4900,1100) 0(4900,1200) 0(4900,1300) 0(4900,1400) 0(4900,1500) 0(4900,1600) 0(4900,1700) 0(4900,1800) 0(4900,1900) 0(4900,2000) 0(4900,2100) 0(4900,2200) 0(4900,2300) 0(4900,2400) 0(4900,2500) 0(4900,2600) 0(4900,2700) 0(4900,2800) 0(4900,2900) 0(4900,3000) 0(4900,3100) 0(4900,3200) 0(4900,3300) 0(4900,3400) 0(4900,3500) 0(4900,3600) 0(4900,3700) 0(4900,3800) 0(5000,700) 0(5000,800) 0(5000,900) 0(5000,1000) 0(5000,1100) 0(5000,1200) 0(5000,1300) 0(5000,1400) 0(5000,1500) 0(5000,1600) 0(5000,1700) 0(5000,1800) 0(5000,1900) 0(5000,2000) 0(5000,2100) 0(5000,2200) 0(5000,2300) 0(5000,2400) 0(5000,2500) 0(5000,2600) 0(5000,2700) 0(5000,2800) 0(5000,2900) 0(5000,3000) 0(5000,3100) 0(5000,3200) 0(5000,3300) 0(5000,3400) 0(5000,3500) 0(5000,3600) 0(5000,3700) 0(5000,3800) 0(5100,700) 0(5100,800) 0(5100,900) 0(5100,1000) 0(5100,1100) 0(5100,1200) 0(5100,1300) 0(5100,1400) 0(5100,1500) 0(5100,1600) 0(5100,1700) 0(5100,1800) 0(5100,1900) 0(5100,2000) 0(5100,2100) 0(5100,2200) 0(5100,2300) 0(5100,2400) 0(5100,2500) 0(5100,2600) 0(5100,2700) 0(5100,2800) 0(5100,2900) 0(5100,3000) 0(5100,3100) 0(5100,3200) 0(5100,3300) 0(5100,3400) 0(5100,3500) 0(5100,3600) 0(5100,3700) 0(5100,3800) 0(5200,700) 0(5200,800) 0(5200,900) 0(5200,1000) 0(5200,1100) 0(5200,1200) 0(5200,1300) 0(5200,1400) 0(5200,1500) 0(5200,1600) 0(5200,1700) 0(5200,1800) 0(5200,1900) 0(5200,2000) 0(5200,2100) 0(5200,2200) 0(5200,2300) 0(5200,2400) 0(5200,2500) 0(5200,2600) 0(5200,2700) 0(5200,2800) 0(5200,2900) 0(5200,3000) 0(5200,3100) 0(5200,3200) 0(5200,3300) 0(5200,3400) 0(5200,3500) 0(5200,3600) 0(5200,3700) 0(5200,3800) 0(5300,700) 0(5300,800) 0(5300,900) 0(5300,1000) 0(5300,1100) 0(5300,1200) 0(5300,1300) 0(5300,1400) 0(5300,1500) 0(5300,1600) 0(5300,1700) 0(5300,1800) 0(5300,1900) 0(5300,2000) 0(5300,2100) 0(5300,2200) 0(5300,2300) 0(5300,2400) 0(5300,2500) 0(5300,2600) 0(5300,2700) 0(5300,2800) 0(5300,2900) 0(5300,3000) 0(5300,3100) 0(5300,3200) 0(5300,3300) 0(5300,3400) 0(5300,3500) 0(5300,3600) 0(5300,3700) 0(5300,3800) 0(5400,700) 0(5400,800) 0(5400,900) 0(5400,1000) 0(5400,1100) 0(5400,1200) 0(5400,1300) 0(5400,1400) 0(5400,1500) 0(5400,1600) 0(5400,1700) 0(5400,1800) 0(5400,1900) 0(5400,2000) 0(5400,2100) 0(5400,2200) 0(5400,2300) 0(5400,2400) 0(5400,2500) 0(5400,2600) 0(5400,2700) 0(5400,2800) 0(5400,2900) 0(5400,3000) 0(5400,3100) 0(5400,3200) 0(5400,3300) 0(5400,3400) 0(5400,3500) 0(5400,3600) 0(5400,3700) 0(5400,3800) 0(5500,700) 0(5500,800) 0(5500,900) 0(5500,1000) 0(5500,1100) 0(5500,1200) 0(5500,1300) 0(5500,1400) 0(5500,1500) 0(5500,1600) 0(5500,1700) 0(5500,1800) 0(5500,1900) 0(5500,2000) 0(5500,2100) 0(5500,2200) 0(5500,2300) 0(5500,2400) 0(5500,2500) 0(5500,2600) 0(5500,2700) 0(5500,2800) 0(5500,2900) 0(5500,3000) 0(5500,3100) 0(5500,3200) 0(5500,3300) 0(5500,3400) 0(5500,3500) 0(5500,3600) 0(5500,3700) 0(5500,3800) 0(5600,700) 0(5600,800) 0(5600,900) 0(5600,1000) 0(5600,1100) 0(5600,1200) 0(5600,1300) 0(5600,1400) 0(5600,1500) 0(5600,1600) 0(5600,1700) 0(5600,1800) 0(5600,1900) 0(5600,2000) 0(5600,2100) 0(5600,2200) 0(5600,2300) 0(5600,2400) 0(5600,2500) 0(5600,2600) 0(5600,2700) 0(5600,2800) 0(5600,2900) 0(5600,3000) 0(5600,3100) 0(5600,3200) 0(5600,3300) 0(5600,3400) 0(5600,3500) 0(5600,3600) 0(5600,3700) 0(5600,3800) 0(5700,700) 0(5700,800) 0(5700,900) 0(5700,1000) 0(5700,1100) 0(5700,1200) 0(5700,1300) 0(5700,1400) 0(5700,1500) 0(5700,1600) 0(5700,1700) 0(5700,1800) 0(5700,1900) 0(5700,2000) 0(5700,2100) 0(5700,2200) 0(5700,2300) 0(5700,2400) 0(5700,2500) 0(5700,2600) 0(5700,2700) 0(5700,2800) 0(5700,2900) 0(5700,3000) 0(5700,3100) 0(5700,3200) 0(5700,3300) 0(5700,3400) 0(5700,3500) 0(5700,3600) 0(5700,3700) 0(5700,3800) 0(5800,700) 0(5800,800) 0(5800,900) 0(5800,1000) 0(5800,1100) 0(5800,1200) 0(5800,1300) 0(5800,1400) 0(5800,1500) 0(5800,1600) 0(5800,1700) 0(5800,1800) 0(5800,1900) 0(5800,2000) 0(5800,2100) 0(5800,2200) 0(5800,2300) 0(5800,2400) 0(5800,2500) 0(5800,2600) 0(5800,2700) 0(5800,2800) 0(5800,2900) 0(5800,3000) 0(5800,3100) 0(5800,3200) 0(5800,3300) 0(5800,3400) 0(5800,3500) 0(5800,3600) 0(5800,3700) 0(5800,3800)
  oct 400x400 hole 150: 8(3820,1160)
  round 125 hole 125 unplated: MH1(5862.2,437.8) MH2(468.5,437.8) MH3(470,4255) MH4(5862.2,4256.69)

## Via types
v1: diameter 30, hole 14, Top to Bottom, tented both sides, 8 vias
v2: diameter 50, hole 30, Top to Bottom, tented bottom, 1 vias
v3: diameter 50, hole 28, Top to Bottom, tented both sides, 1 vias

## Nets (pads, with @x,y where several pads share a name; then routed paths per layer and width w, separated by ;. In a path a pad name is that pad's centre, name@x,y a point inside that pad or via, vN(x,y) a via of type N, cw(c..) or ccw(c..) an arc to the next point about the centre after c; other vN are vias at no path point)
+5: C1.1 C6.2 IC1.1 J3.7 R5.2 R6.2 R7.2 U1.3 U2.20 U$1.VIN | length 6333.6
  Top w50: 2000,1787.5 2000,1600 2105,1495 J3.7 ; IC1.1 2007.5,1847.5 2007.5,1887.5 2180,2060 2869.27,2060 ; U$1.VIN 2770,2719.79 2769.71,2719.5 2830,2659.22 2830,2350 2870.01,2309.99 2870.01,1909.99 2957.17,1822.83 ; C6.2 2930.79,2760 U2.20 ; R5.2 2957.17,1822.83 ; 2960,1680 R6.2 ; U1.3 3920,660 3560,1020 3560,1525.61 3576.59,1542.2 3576.59,1763.41 3540,1800 2980,1800 2957.17,1822.83
  Bottom w20: U$1.VIN 2825,3380 3040,3380 R7.2@3100,3440
+12: *1.6 D1.2 IC2.3 J3.1 R8.2 | length 5453.7
  Top w15: J3.1 1505,2205 v1(1780,2480)
  Top w50: *1.6 *1.6@962.87,1397.13 ; v2(1340,980) 3009.13,980 D1.2 3282.83,1253.7 R8.2
  Bottom w15: v1(1780,2480) 1988.35,2688.35 2008.35,2688.35 2290,2970 IC2.3
  Bottom w50: *1.6 1080,1400 ; v2(1340,980) 1080,1240 1080,1400 ; J3.1 1395,1420 1181.61,1420 1161.61,1400 1080,1400
AGND: IC1.18 J3.20 J3.25 J3.26 R1.1 U$1.AGND | length 3354.3
  Top w10: 2054.98,1395.39 2054.98,1260.02 J3.20
  Top w12: J3.20 2175,1140 2535,1140 J3.25 J3.26
  Top w20: R1.1@1800,2060 1907.28,2060 ; IC1.18 2000,2222.5 1907.28,2129.78 1907.28,2060 ; 2054.98,1395.39 1907.28,1543.1 1907.28,2060
  Bottom w15: IC1.18@2009.57,2230.43 IC1.18 2000,2257.5 2236.96,2494.46 2343.93,2494.46 2571.32,2721.86 2571.32,3226.32 U$1.AGND
GND: *1.3 *1.4 C1.2 C2.2 C3.2 C4.2 C5.1 C6.1 D2.2 D3.2 D4.2 D5.2 FUCKINGBIGLCD.P1 FUCKINGBIGLCD.P2 FUCKINGBIGLCD.P18 IC2.2 J1.3 J2.1 J3.14 pad.8 Q1.1 Q2.3 Q3.1 R1.2 R2.1 R11.1 U1.2 U2.8 U2.19 U$1.GND U$1.GND2 U$1.GND3 VR1.3 | length 12.4
  Top w20: U$1.GND U$1.GND@2774.37,3929.37 ; FUCKINGBIGLCD.P18@2774.37,4290.12 FUCKINGBIGLCD.P18
Net*1_1: *1.1 U$1.12/MISO | length 2978.7
  Bottom w12: *1.1 660,2522.25 618.76,2563.49 618.76,3558.61 932.56,3872.4 1417.4,3872.4 U$1.12/MISO
Net*1_7: *1.7 *1.8 J3.15 | length 100
  Top w50: *1.7 *1.8
NetC2_1: C2.1 C3.1 D1.1 U1.1 | length 1967.4
  Top w50: D1.1 3228.54,449.13 3279.41,500 U1.1@3730,500
  Bottom w50: D1.1 3220,782.72 3414.92,977.64 3414.92,1580.63 ; C2.1 3405.08,1570.79 3414.92,1580.63 ; C3.1 3414.92,1580.63
NetD2_1: D2.1 R14.2 U$1.28 | length 2314.1
  Top w15: v1(800,3620) 870,3690 U$1.28
  Bottom w15: v1(800,3620) 721.69,3541.69 721.69,2558.31 1229.88,2050.12 D2.1 ; D2.1@1282.83,2057.17 R14.2
NetD3_1: D3.1 R4.2 U$1.13/SCK | length 1436.3
  Bottom w12: U$1.13/SCK 1470,2147.17 R4.2 1652.95,2057.17 D3.1@1680,2030.12
NetD4_1: D4.1 R15.1 U$1.1/TX | length 1165.5
  Top w15: U$1.1/TX 2675,3820 2880,3820 3000,3700 3000,3225.03 2999.07,3224.1 2999.07,3216.24 R15.1 2887.05,3197.17 D4.1
NetD5_1: D5.1 R16.1 U$1.0/RX | length 1298.1
  Top w15: U$1.0/RX 2735,3860 2995.58,3860 3275.58,3580 3277.17,3580 R16.1 3672.95,3297.17 D5.1 ; R16.1@3535.91,3319.67 3537.5,3319.67 3540,3317.17 R16.1@3540,3297.17
NetFUCKINGBIGLCD_P4: FUCKINGBIGLCD.P4 VR1.2 | length 515.3
  Top w15: VR1.2 965,4220 1304.25,4220 FUCKINGBIGLCD.P4
NetFUCKINGBIGLCD_P5: FUCKINGBIGLCD.P5 U$1.27 | length 661.8
  Top w15: U$1.27 1125,4080 1220,4080 1300,4160 1344.25,4160 FUCKINGBIGLCD.P5
NetFUCKINGBIGLCD_P7: FUCKINGBIGLCD.P7 U$1.26 | length 761.8
  Top w15: U$1.26 1166.11,4021.11 1221.11,4021.11 1308.99,4108.99 1468.99,4108.99 1645.88,4285.88 1670.13,4285.88 FUCKINGBIGLCD.P7
NetFUCKINGBIGLCD_P8: FUCKINGBIGLCD.P8 U$1.25 | length 841.3
  Top w15: U$1.25 1181.64,3925 1316.64,4060 1680,4060 1778.74,4158.74 FUCKINGBIGLCD.P8
NetFUCKINGBIGLCD_P9: FUCKINGBIGLCD.P9 U$1.24 | length 817.9
  Top w15: U$1.24 1345,4000 1680,4000 1878.74,4198.74 FUCKINGBIGLCD.P9
NetFUCKINGBIGLCD_P10: FUCKINGBIGLCD.P10 U$1.2 | length 1012.3
  Bottom w15: FUCKINGBIGLCD.P10 1978.74,4116.31 1920,4057.57 1920,3900 1960,3860 2405,3860 U$1.2
NetFUCKINGBIGLCD_P11: FUCKINGBIGLCD.P11 U$1.14/A0 | length 1194.4
  Top w15: U$1.14/A0 1720,3475 1720,3960 1840,4080 1864.25,4080 FUCKINGBIGLCD.P11
NetFUCKINGBIGLCD_P12: FUCKINGBIGLCD.P12 U$1.7 | length 456
  Bottom w15: U$1.7 2178.74,4133.74 FUCKINGBIGLCD.P12
NetFUCKINGBIGLCD_P13: FUCKINGBIGLCD.P13 U$1.8 | length 585.5
  Top w15: U$1.8 1870,3965.42 2129.58,4225 2200,4225 2269.49,4294.49 FUCKINGBIGLCD.P13
NetFUCKINGBIGLCD_P14: FUCKINGBIGLCD.P14 U$1.6 | length 497.4
  Top w15: U$1.6 2070,3985.75 FUCKINGBIGLCD.P14
NetFUCKINGBIGLCD_P15: FUCKINGBIGLCD.P15 U$1.20/A6 | length 1097.4
  Top w15: U$1.20/A6 2178.23,3333.23 2178.23,3353.51 2180,3355.29 2180,3680 2269.63,3769.63 2269.63,3833.12 2318.88,3882.37 2318.88,3962.14 2478.74,4122 FUCKINGBIGLCD.P15
NetFUCKINGBIGLCD_P16: FUCKINGBIGLCD.P16 U$1.21/A7 | length 1097.4
  Top w15: U$1.21/A7 2320,3375 2320,3437.93 2468.07,3586 2468.07,3822.32 2520,3874.25 2520,3962 2578.74,4020.74 FUCKINGBIGLCD.P16
NetFUCKINGBIGLCD_P17: FUCKINGBIGLCD.P17 U$1.5 | length 661.8
  Bottom w15: U$1.5 2351.61,4106.61 2490.86,4106.61 FUCKINGBIGLCD.P17
NetFUCKINGBIGLCD_P19: FUCKINGBIGLCD.P19 VR1.1 | length 2118.4
  Top w15: VR1.1 893.17,4348.17 2812.88,4348.17 2841.89,4319.16 2852.39,4308.66 2866.56,4294.49 FUCKINGBIGLCD.P19
NetFUCKINGBIGLCD_P20: FUCKINGBIGLCD.P20 R7.1 | length 645.5
  Top w20: FUCKINGBIGLCD.P20 2880,4195.75 2880,4011.64 2974.83,3916.81 3017.52,3916.81 R7.1
NetFUCKINGBIGLCD_P21: FUCKINGBIGLCD.P21 Q2.1 | length 213.8
  Top w20: Q2.1@3078.74,4080.67 FUCKINGBIGLCD.P21
NetIC1_2: IC1.2 J3.8 | length 573.5
  Top w15: IC1.2 2100,1600 2205,1495 J3.8
NetIC1_3: IC1.3 J3.21 | length 673
  Top w10: J3.21 2254.39,1259.39 2254.39,1374.39
  Top w15: IC1.3 2200,1543.39 2254.39,1489.01 2254.39,1374.39
NetIC1_4: IC1.4 J3.9 | length 532.1
  Top w12: IC1.4 IC1.4@2302.5,1837.5 ; J3.9@2302.5,1312.5 J3.9
  Top w15: J3.9@2302.5,1312.5 2302.5,1697.5 IC1.4@2302.5,1837.5
NetIC1_5: IC1.5 J3.22 | length 669.4
  Top w10: J3.22 2354.93,1259.93 2354.93,1385.11
  Top w15: 2354.93,1385.11 2354.93,1637.43 2400,1682.5 IC1.5
NetIC1_6: IC1.6 J3.10 | length 569.4
  Top w15: J3.10 2405,1385 2500,1480 IC1.6
NetIC1_7: IC1.7 J3.23 R5.1 | length 730.8
  Top w10: J3.23 2454.39,1259.39 2454.39,1374.39
  Top w15: 2454.39,1374.39 2600,1520 R5.1@2600,1560 ; R5.1@2600,1540 R5.1@2600,1560 ; IC1.7 R5.1@2600,1560
NetIC1_8: IC1.8 J3.11 | length 610.8
  Top w10: J3.11 J3.11@2515.25,1320.25
  Top w15: J3.11@2515.25,1320.25 2515.25,1355.25 2700,1540 IC1.8
NetIC1_9: IC1.9 J3.24 R6.1 | length 780.2
  Top w10: J3.24 2554.72,1259.72 2554.72,1354.72
  Top w15: 2554.72,1354.72 2620,1420 2700,1420 2800,1520 R6.1@2800,1660 ; R6.1@2797.17,1680 2797.17,1837.17 IC1.9
NetIC1_10: IC1.10 U$1.38/A19 | length 2323.4
  Top w12: U$1.38/A19 970,3250 1020,3200 1660,3200 2400,2460 2580,2460 IC1.10
NetIC1_11: IC1.11 U$1.37/A18 | length 2331.6
  Top w12: U$1.37/A18 870,3270 1000,3140 1660,3140 2380,2420 2540,2420 IC1.11@2720,2240
NetIC1_12: IC1.12 U$1.36/A17 | length 2326.3
  Top w12: U$1.36/A17 770,3270 940,3100 1643.1,3100 2363.1,2380 2463.16,2380 2609.03,2234.13 IC1.12@2609.03,2230.97
NetIC1_13: IC1.13 U$1.35/A16 | length 2325.2
  Top w12: U$1.35/A16 670,3250 860,3060 1632.66,3060 2352.66,2340 2403.16,2340 2500,2243.16 IC1.13
NetIC1_14: IC1.14 U$1.34/A15 | length 2313
  Top w12: U$1.34/A15 570,3270 820,3020 1600.43,3020 2353.65,2266.79 2375.52,2266.79 2400,2242.3 IC1.14
NetIC1_15: IC1.15 U$1.33/A14 | length 2301.8
  Top w12: U$1.33/A14 473.73,3321.27 473.73,3286.27 780,2980 1560,2980 2267.54,2272.46 2270.7,2272.46 2300,2243.16 IC1.15
NetIC1_16: IC1.16 U$1.31/A12 | length 2941.2
  Top w12: U$1.31/A12 419.82,3774.82 419.82,3280.18 760,2940 1520,2940 IC1.16@2222.24,2237.76
NetIC1_17: IC1.17 U$1.32/A13 | length 2856.5
  Top w12: U$1.32/A13 380,3835 380,3260 740,2900 1460,2900 2100,2260 IC1.17
NetIC2_1: IC2.1 U$1.3/CANTX | length 1090.6
  Top w10: IC2.1@2465,3078.74 IC2.1
  Top w15: U$1.3/CANTX 2370,3680.22 2224.66,3534.88 2224.66,3295.34 2447.22,3072.78 2470.96,3072.78 IC2.1
NetIC2_4: IC2.4 U$1.4/CANRX | length 960.2
  Top w15: IC2.4 2122.59,3121.15 2122.59,3689.54 2171.23,3738.18 2171.23,3826.23 U$1.4/CANRX
NetIC2_6: IC2.6 J3.17 | length 1939.5
  Top w10: 1620,1480 1755.1,1344.9 1755.1,1259.9 J3.17
  Top w15: 1620,1480 1620,2160 v1(1860,2400)
  Bottom w15: v1(1860,2400) 2080,2620 2163.74,2620 IC2.6
NetIC2_7: IC2.7 J3.4 | length 1762.9
  Top w10: 1720,1420 1792.22,1347.78 1792.22,1322.78 J3.4
  Top w15: 1720,1420 1720,2100 v1(1940,2320)
  Bottom w15: v1(1940,2320) 1946.7,2326.7 1970.44,2326.7 IC2.7
NetIC2_8: IC2.8 R2.2 | length 179.7
  Top w20: IC2.8 2627.6,2746.26 2651.03,2722.83 R2.2
NetJ1_2: J1.2 U$1.18/A4/SDA | length 2937.6
  Top w12: J1.2 815,882.99 828.05,896.03 828.05,947.56 823,952.6 823,987.4 828.05,992.44 828.05,1948.05 v1(1580,2700)
  Bottom w12: v1(1580,2700) 1970,3090 U$1.18/A4/SDA
NetJ1_5: J1.5 U$1.19/A5/SCL | length 2899.7
  Top w12: J1.5 965,1108.33 860,1213.33 860,1880 v1(1620,2640)
  Bottom w12: v1(1620,2640) 2070,3090 U$1.19/A5/SCL
NetJ2_2: J2.2 U$1.VBAT | length 1543.9
  Top w15: J2.2 800,2660 v1(900,2760)
  Bottom w15: v1(900,2760) 1020,2880 1020,3775 U$1.VBAT
NetJ3_2: J3.2 R4.1 | length 411.5
  Top w12: R4.1@1560,1694.54 1580,1674.54 1580,1350.1 J3.2@1605,1325.1
  Top w20: R4.1@1560,1694.54 R4.1 ; J3.2 J3.2@1605,1325.1
NetJ3_3: J3.3 R14.1 | length 519.2
  Bottom w15: R14.1 1400,1615 J3.3
NetJ3_5: J3.5 Q1.3 R8.1 R9.2 | length 3565.3
  Top w15: R8.1 3637.17,1617.25 3760,1740.08 3760,1982.83 R9.2 3800,2201.21 3847.97,2249.18 3847.97,2622.03 Q1.3
  Bottom w12: J3.5 2195,1600 2860,1600 2981,1721 3135.93,1721 3136.93,1722 3171.73,1722 3172.73,1721 3519,1721 3637.17,1602.83 R8.1
NetJ3_6: J3.6
NetJ3_12: J3.12
NetJ3_13: J3.13
NetJ3_16: J3.16 R16.2 U2.17 | length 3440.9
  Top w15: U2.17 3270.19,2909.81 3526.98,2909.81 R16.2
  Bottom w10: J3.16 1754.39,1259.39 1754.39,1347.6 ; 2878.75,1819.19 2879.07,1819.5 2882,1822.43
  Bottom w12: 1754.39,1347.6 2126.78,1720 2760,1720 2878.75,1819.19 ; 2882,1822.43 2882,2301.91 3091.72,2511.63 3140.82,2511.63 3220,2590.81 3220,2960
  Bottom w15: U2.17 3220,2960
NetJ3_18: J3.18 Q3.3 R12.1 | length 1905.8
  Top w12: Q3.3@2980,2062.52 Q3.3 R12.1
  Bottom w10: 1855.61,1355.61 1855.61,1259.39 J3.18 ; 2920,2040 2939.78,2059.78 2951.97,2059.78 2962.19,2070 Q3.3
  Bottom w12: 1855.61,1355.61 2126.12,1626.12 2846.12,1626.12 2920,1700 2920,2040
NetJ3_19: J3.19
NetQ1_2: Q1.2 R10.1 | length 191.4
  Top w15: R10.1@3540,2817.17 R10.1@3557.17,2800 ; R10.1 3577.17,2800 Q1.2
NetQ2_2: Q2.2 R3.1 | length 157.2
  Top w20: R3.1@2941.42,4018.58 Q2.2@3098.58,4018.58
NetQ3_2: Q3.2 R13.1 | length 608.5
  Top w12: Q3.2@3000,2020 3007.94,2020 3018.6,2009.34 3223.58,2009.34 3326.38,1906.54 3556.3,1906.54 R13.1
NetR3_2: R3.2 U$1.23/A9 | length 659.7
  Top w15: U$1.23/A9 2560,3415 2560,3500 2722.83,3662.83 R3.2
NetR9_1: R9.1 R11.2 U2.5 | length 367.1
  Top w12: U2.5 3432.73,2360 3449.9,2377.17 R11.2@3660,2377.17 ; R11.2 R9.1
NetR10_2: R10.2 U2.6 | length 142.6
  Top w15: U2.6 3421.42,2461.42 R10.2@3538.58,2461.42 ; R10.2@3540,2462.83 R10.2@3538.58,2461.42 ; R10.2@3560,2461.42 R10.2@3538.58,2461.42
NetR12_2: R12.2 U2.3 | length 640.7
  Top w12: R12.2 3007.94,2509.23 3146.65,2509.23 3216.61,2439.27 3216.61,2383.39 3411,2189 3411,2169 U2.3
NetR13_2: R13.2 U2.4 | length 121.2
  Top w12: U2.4 3421.42,2258.58 R13.2@3538.58,2258.58 ; R13.2@3558.58,2258.58 R13.2
NetR15_2: R15.2 U2.18 | length 188.5
  Top w12: R15.2 2987.87,2850.71 3010.71,2850.71 U2.18
NetU3_1: U3.1 U$1.22/A8 | length 2261.7
  Top w12: v1(3401.46,3643.78) 3777.68,4020 4259.18,4020 4275.18,4036 U3.1
  Bottom w12: U$1.22/A8 2378.73,3333.73 2378.73,3358.73 2420,3400 2420,3460 2480,3520 3280,3520 3401.46,3641.46 v1(3401.46,3643.78)
NetU3_2: U3.2 U$1.15/A1 | length 3043.7
  Bottom w12: U$1.15/A1 1670,3430 1840,3600 3080,3600 3580,4100 4299.18,4100 4314.18,4115 U3.2
NetU3_3: U3.3 U$1.16/A2 | length 2927.6
  Bottom w12: U$1.16/A2 1770,3390 1951.63,3571.63 3157.18,3571.63 3565.55,3980 4309,3980 U3.3
NetU3_4: U3.4 U$1.17/A3 | length 2939.5
  Bottom w12: U$1.17/A3 2092.83,3547.83 3227.83,3547.83 3620,3940 4340,3940 4420,4020 4420,4088.18 4404,4104.18 U3.4
VCC: C4.1 C5.2 FUCKINGBIGLCD.P3 FUCKINGBIGLCD.P6 IC2.5 J1.4 U$1.3V3 U$1.3V3_2 U$1.3V3_LO | length 5050.1
  Top w20: v3(780,2600) 780,1164.14 700,1084.14 700,898.16 778.16,820 865,820 J1.4 ; IC2.5 2283.74,2840 2570,2840 U$1.3V3_LO
  Bottom w20: v3(780,2600) 780,3060 920,3200 920,3675 U$1.3V3_2 ; C5.2@1193.31,4144.09 1242.83,4144.09 1299.37,4200.63 ; FUCKINGBIGLCD.P3 1278.74,4221.26 1299.37,4200.63 ; U$1.3V3 1370,4180 ; FUCKINGBIGLCD.P6 1578.74,4218.74 1549.44,4189.44 ; C4.1@1601.26,4160 1585.67,4175.59 1563.3,4175.59 1549.44,4189.44 ; IC2.5@2183.74,2740 IC2.5 ; 1299.37,4200.63 1320,4180 1370,4180 ; 1370,4180 1540,4180 1549.44,4189.44
pads on no net: *1.2 *1.5 FUCKINGBIGLCD.P22 J1.1 J1.6 J1.MH1 J1.MH2 J3.27 J3.28 U2.1 U2.2 U2.7 U2.9 U2.10 U2.11 U2.12 U2.13 U2.14 U2.15 U2.16 U2.21 U2.22 U2.23 U2.24 U2.25 U2.26 U2.27 U2.28 U$1.9/CS U$1.10/CS U$1.11/MOSI U$1.21/DAC0 U$1.29 U$1.30 U$1.39/A20 U$1.A10 U$1.A11 U$1.A22/DAC1 U$1.AREF U$1.PROG U$1.RESET U$1.U5V U$1.UD+ U$1.UD- U$1.UGND1 U$1.UGND2 U$1.VUSB
copper on no net: | length 5
  Top w12: 1070,3325 1075,3325

## Polygon pours and split planes (outlines as drawn)
Net*1_7 on Top "NET*1_7_L01_P000" (solid, remove dead copper, pour order 0): 931.32,1660 1400,1660 1500,1560 1500,1367.39 1627.56,1367.39 1660,1340 1660,1100 1600,1040 1120,1040 900,1260 900,1628.68
GND on Bottom "GND_L02_P001" (solid, pour order 1): 360,4360 5960,4360 5960,420 5880,340 360,340

## Keep-outs
Keep-Out Layer:
  the board outline again, w2

## Other copper
Bottom:
  pour cut-out: 3940.11,3860 3939.76,1441.65 4138.7,1441.65 4140.28,640.12 5860,639.21 5860,3860

## Silkscreen, mask and mechanical layers (free items; w line width, h text height)
Top Overlay:
  text "JE" at 4690,4110 h240
  text "agan Engineering" at 5127,4100.33 h40
  text "Trojan EFI Dash" at 4675,3979.99 h75
  text "v1.0" at 5310,3890 h60
  text "JLCJLCJLCJLC" at 2426,446 h32
Dimension:
  lines w0: 0,0 0,4637.01 6299.21,4637.01 6299.21,0 0,0

## Text inside footprints (layer, text, board x,y; h text height)
*1: Top Overlay "LS Driver" at 792,1603 h40 r270
C3: Top Overlay "+" at 3549.02,1466.14 h59.06 r90
C4: Top Overlay "+" at 1485.51,4110.98 h59.06
IC1: Top Overlay "Signal Buffer" at 2045.11,2020.01 h60
U$1: tPlace "3.6" at 1563.75,3668.75 h108.5 r180; tPlace "TEENSY" at 1563.75,3581.25 h108.5 r180